# Altium PCB BuckBoost-1.PcbDoc (part 2 of 2)
Units mil, origin at the board's own origin, x right, y up, seen from the top; angles counter-clockwise.
Board outline 4724.41 x 2755.91 mil, 2 copper layers (Top Layer, Bottom Layer); 132 components, 89 nets, 410 pads, 962 vias.
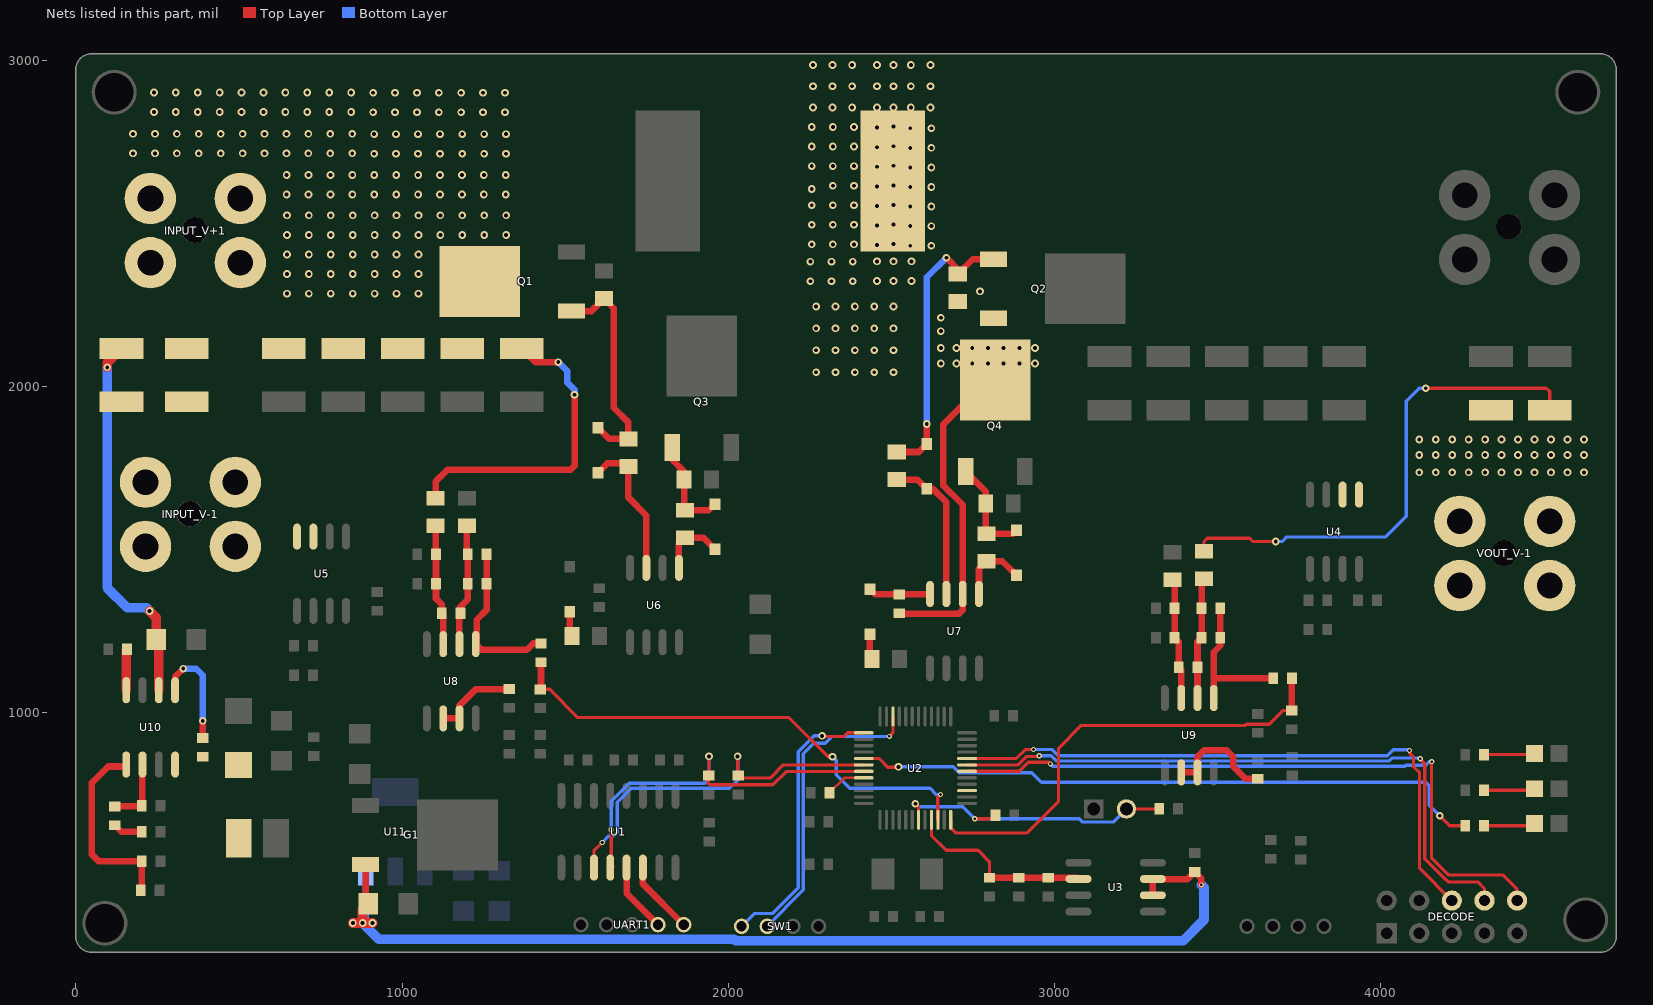
[diagram p2: the nets of this part, all layers, seen from the top]

## Via types
v1: diameter 23.62, hole 11.81, Top Layer to Bottom Layer, tented both sides, 942 vias
v2: diameter 16, hole 8, Top Layer to Bottom Layer, tented both sides, 16 vias
v3: diameter 16, hole 10, Top Layer to Bottom Layer, tented both sides, 2 vias
v4: diameter 16, hole 11.81, Top Layer to Bottom Layer, tented both sides, 1 vias
v5: diameter 16, hole 8, Top Layer to Bottom Layer, 1 vias

## Nets (pads, with @x,y where several pads share a name; then routed paths per layer and width w, separated by ;. In a path a pad name is that pad's centre, name@x,y a point inside that pad or via, vN(x,y) a via of type N, cw(c..) or ccw(c..) an arc to the next point about the centre after c; other vN are vias at no path point) (continued)
NetC36_1: C36.1 L1.2 Q2.S Q4.D R14.2 U7.6 | length 1009.3
  Top Layer w20: C36.1@2524.6,1305 2525.66,1303.94 2707.94,1303.94 2719,1315 U7.6@2719,1363.94 2719,1637.43 2659,1697.43 2659,1883 Q4.D@2796.75,2020.75 ; Q4.D@2814.19,2020.75 Q4.D@2836.44,2020.75
  other v1: 2269.56,2044 2328.92,2044 2388.28,2044 2447.64,2044 2507,2044 2652,2071 2700.17,2071 2748.33,2071 2796.5,2071 2844.67,2071 2892.83,2071 2941,2071 2269.56,2111.2 2328.92,2111.2 2388.28,2111.2 2447.64,2111.2 2507,2111.2 2652,2118 2700.17,2118 2748.33,2118 2796.5,2118 2844.67,2118 2892.83,2118 2941,2118 2652,2170 2269.56,2178.4 2328.92,2178.4 2388.28,2178.4 2447.64,2178.4 2507,2178.4 2652,2211 2269.56,2245.6 2328.92,2245.6 2388.28,2245.6 2447.64,2245.6 2507,2245.6 2772,2292 2252,2323 2317,2323 2382,2323 2456,2324 2507,2324 2562,2324 2252,2383 2317,2383 2382,2383 2456,2384 2507,2384 2562,2384 2558,2432 2623,2432 2456,2434 2256,2436 2321,2436 2386,2436 2507,2437 2558,2492 2623,2492 2456,2494 2256,2496 2321,2496 2386,2496 2507,2497 2558,2552 2623,2552 2456,2554 2256,2556 2321,2556 2386,2556 2507,2557 2256,2606 2558,2612 2623,2612 2456,2614 2321,2616 2386,2616 2507,2617 2558,2672 2623,2672 2456,2674 2256,2676 2321,2676 2386,2676 2507,2677 2558,2732 2623,2732 2456,2734 2256,2736 2321,2736 2386,2736 2507,2737 2558,2792 2623,2792 2456,2794 2256,2796 2321,2796 2386,2796 2507,2797 2260,2856 2320,2856 2380,2856 2456,2856 2507,2856 2560,2856 2620,2856 2260,2921 2320,2921 2380,2921 2456,2921 2507,2921 2560,2921 2620,2921 2260,2986 2320,2986 2380,2986 2456,2986 2507,2986 2560,2986 2620,2986
NetC36_2: C36.2 D2.2 U7.8 | length 192.1
  Top Layer w20: D2.2@2434.22,1378.9 2450.56,1362.56 C36.2@2524.6,1362.56 2617.62,1362.56 U7.8@2619,1363.94
NetC38_1: C38.1 C40.2 R19.1 R21.2 U8.3 | length 372.2
  Top Layer w20: R21.2@1102.73,1572.97 1102.73,1486.67 C38.1@1104,1485.39 R19.1@1104,1395.38 1104,1350 1121.44,1332.56 C40.2@1121.44,1305.37 1126,1300.81 U8.3@1126,1210.36
NetC39_1: C39.1 C41.2 R20.1 R22.2 U9.3 | length 373.5
  Top Layer w20: R22.2@3362.73,1407.58 3368.93,1401.37 R20.1@3368.93,1320 C39.1@3368.93,1229.99 3381.44,1217.48 C41.2@3381.44,1139.98 3389,1132.42 U9.3@3389,1044.97
NetC40_1: C40.1 C44.2 R25.2 R27.2 U8.2 | length 374.2
  Top Layer w20: U8.2@1176,1210.36 1176,1302.37 C40.1@1179,1305.37 1179,1325 1201.44,1347.44 R27.2@1201.44,1395.38 C44.2@1201.44,1485.39 1199,1487.83 R25.2@1199,1572.97
NetC41_1: C41.1 C45.2 R26.2 R28.2 U9.2 | length 373.9
  Top Layer w20: U9.2@3439,1044.97 C41.1@3439,1139.98 3439,1217.55 C45.2@3451.44,1229.99 R28.2@3451.44,1320 3451.44,1403.07 R26.2@3459,1410.63
NetC44_1: C44.1 R23.2 R27.1 U8.1 | length 504.4
  Top Layer w20: C44.1@1259,1485.39 R27.1@1259,1395.38 1259,1315 1229,1285 1229,1213.36 U8.1@1226,1210.36 1243.36,1193 1383,1193 1403,1213 1425.56,1213 R23.2@1426,1212.56
NetC45_1: C45.1 R24.2 R28.1 U9.1 | length 465.8
  Top Layer w20: U9.1@3489,1044.97 3489,1105 ; R28.1@3509,1320 C45.1@3509,1229.99 3509,1205 3489,1185 3489,1105 ; R24.2@3671.44,1105 3489,1105
NetC49_1: C49.1 D7.2 R31.1 U10.8 | length 2
  Top Layer w20: D7.2@497.58,841.06 D7.2@499,839.65
NetC49_2: C49.2 U10.1 | length 340.6
  Top Layer w20: U10.1@304,1068.94 304,1110 v1(329,1135) ; C49.2@386.56,925 C49.2@389,922.56 v1(389,975)
  Bottom Layer w20: v1(329,1135) 369,1135 389,1115 v1(389,975)
NetC53_2: C53.2 R33.2 U10.6 | length 210.6
  Top Layer w20: R33.2@119,712.56 199,712.56 C53.2@201.44,715 204,717.56 U10.6@204,841.06
NetC54_2: C54.2 R33.1 | length 90.7
  Top Layer w20: R33.1@119,655 139,635 C54.2@201.44,635
NetC55_2: C55.2 U10.4 | length 127.1
  Top Layer w30: U10.4@154,1068.94 154,1192.44 C55.2@156.56,1195
NetD1_1: D1.1 R11.2 | length 76.9
  Top Layer w20: D1.1@1514.1,1309.05 1514.1,1241.76 R11.2@1520.86,1235
NetD2_1: D2.1 R12.2 | length 78.9
  Top Layer w20: D2.1@2434.22,1241.1 2434.22,1171.64 R12.2@2440.86,1165
NetD3_1: D3.1 Q2.G R14.1 R16.2 | length 890.5
  Top Layer w20: R16.2@2517.19,1799.37 2584.37,1799.37 D3.1@2608.9,1823.9 2608.9,1884.9 v1(2609,1885) ; v1(2669,2395) 2704,2360 R14.1@2704,2345 2749.55,2390.55 Q2.G@2813.25,2390.55
  Bottom Layer w20: v1(2609,1885) 2609,2335 v1(2669,2395)
NetD3_2: D3.2 R16.1 U7.7 | length 461.9
  Top Layer w20: R16.1@2517.19,1715 2580,1715 D3.2@2608.9,1686.1 2627.9,1686.1 2669,1645 U7.7@2669,1363.94
NetD4_1: D4.1 Q1.G R13.1 R15.2 | length 684.5
  Top Layer w20: Q1.G@1519.75,2231.68 1580.72,2231.68 R13.1@1619.03,2270 1649,2240.03 1649,1935 1694,1890 R15.2@1694,1839.37 1635.21,1839.37 D4.1@1600.68,1873.9
NetD4_2: D4.2 R15.1 U6.7 | length 443.3
  Top Layer w20: D4.2@1600.68,1736.1 1629.58,1765 1684,1765 R15.1@1694,1755 1694,1660 1749,1605 U6.7@1749,1443.94
NetD5_1: D5.1 Q4.G R10.2 R17.2 | length 312.4
  Top Layer w20: Q4.G@2728.45,1739.25 2789.63,1678.07 R10.2@2789.63,1641.58 2789.63,1551.63 R17.2@2792.19,1549.06 2874.06,1549.06 D5.1@2883.9,1558.9
NetD5_2: D5.2 R17.1 U7.5 | length 220.1
  Top Layer w20: U7.5@2769,1363.94 2769,1441.5 R17.1@2792.19,1464.69 2840.31,1464.69 D5.2@2883.9,1421.1
NetD6_1: D6.1 Q3.G R9.2 R18.2 | length 307.5
  Top Layer w20: Q3.G@1828.45,1812.68 1828.45,1775.55 1864.63,1739.37 R9.2@1864.63,1715 1864.63,1623.25 R18.2@1867.19,1620.68 1940.25,1620.68 D6.1@1958.9,1639.34
NetD6_2: D6.2 R18.1 U6.5 | length 206
  Top Layer w20: U6.5@1849,1443.94 1849,1518.12 R18.1@1867.19,1536.31 1924.13,1536.31 D6.2@1958.9,1501.54
NetDECODE_6: DECODE.6 U2.20 | length 1897.9
  Top Layer w10: U2.20@2732.46,859.53 2882.78,859.53 2910.25,887 v2(2936,887) ; v2(4089,884) 4089,877 4101,865 4101,835 4120,816 4120,523 DECODE.6@4219,424
  Bottom Layer w10: v2(2936,887) 2993.63,887 3012.63,868 4021,868 4039,886 4087,886 v2(4089,884)
NetDECODE_8: DECODE.8 U2.19 | length 1982.4
  Top Layer w10: U2.19@2732.46,839.84 2888.84,839.84 2915,866 2952,866 v2(2954,868) ; v2(4122,859) 4122,857 4136,843 4136,552.11 4200.92,487.19 4201.81,487.19 4208,481 4298,481 4319,460 DECODE.8@4319,424
  Bottom Layer w10: v2(2954,868) 2990,868 3006,852 4027.63,852 4036.81,861.19 4119.81,861.19 v2(4122,859)
NetDECODE_10: DECODE.10 U2.18 | length 2080
  Top Layer w10: U2.18@2732.46,820.16 2892.16,820.16 2920,848 2983,848 v2(2988,843) ; v2(4157,850) 4156.19,849.19 4156.19,554.55 4207.55,503.19 4209.81,503.19 4211,502 4376,502 4419,459 DECODE.10@4419,424
  Bottom Layer w10: v2(2988,843) 2995,836 4075,836 4078,839 4139,839 4150,850 v2(4157,850)
NetERR1_2: ERR1.2 R7.2 | length 157.1
  Top Layer w10: R7.2@4317.56,762.09 4467.69,762.09 ERR1.2@4472.6,767
NetHeat1_2: Heat1.2 R8.2 | length 156.4
  Top Layer w10: R8.2@4317.56,871.59 4469.2,871.59 Heat1.2@4472.6,874.99
NetR5_2: R5.2@2310.96,755.01 U2.44 | length 123.4
  Top Layer w8: R5.2@2310.96,755.01 2356.42,800.47 U2.44@2415.54,800.47
NetR6_2: R6.2 RUN1.2 | length 157.7
  Top Layer w10: R6.2@4317.56,653.59 4466.19,653.59 RUN1.2@4472.6,660
NetR29_2: R29.2 U9.6 U9.7 | length 343.6
  Top Layer w20: U9.6@3389,817.1 3434.12,817.1 U9.7@3436.56,814.65 ; U9.7@3439,817.1 3439,865 3459,885 3529,885 3549,865 3549,835 3586.56,797.44 R29.2@3624,797.44
NetR30_2: R30.2 U8.6 U8.7 | length 264.2
  Top Layer w20: U8.6@1126,982.49 U8.7@1176,982.49 1176,1022 1226.56,1072.56 R30.2@1329,1072.56 R30.2@1328.44,1072
NetR32_1: R32.1 R34.2 U10.5 | length 600
  Top Layer w20: U10.5@154,841.06 147.94,835 99,835 49,785 49,565 69,545 R34.2@201.44,545 201.44,457.44 R32.1@199,455
NetU1_13: U1.13 UART1.2 | length 215
  Top Layer w20: U1.13@1688.4,525.15 1688.4,446.26 UART1.2@1784.66,350
NetU1_14: U1.14 UART1.1 | length 226.9
  Top Layer w20: U1.14@1738.4,525.15 1738.4,475 UART1.1@1863.4,350
NRST: C13.2 J1.2 R5.2@3321.44,705 U2.7 | length 908.8
  Top Layer w10: v1(2574,721) 2583.84,711.16 U2.7@2583.84,671.54 ; v2(2756,675) 2809.44,675 C13.2@2819.44,685 ; J1.2@3221,705.01 R5.2@3321.44,705
  Bottom Layer w10: v1(2574,721) 2583.5,711.5 2719.5,711.5 v2(2756,675) 3076.4,675 3086.92,664.48 3180.47,664.48 J1.2@3221,705.01
OPAMP2_VINM: U2.15
REF_3: C5.2 C6.2 C14.2 U2.9 U3.6 | length 583.3
  Top Layer w10: U2.9@2623.21,671.54 2623.21,623.43 2668.64,578 2766.1,578 2801.1,543 C6.2@2801.1,493.56
  Top Layer w20: C6.2@2801.1,493.56 C5.2@2891.11,493.56 C14.2@2981.12,493.56 3070.57,493.56 U3.6@3074.13,490
RUN_GREEN: R6.1 U2.41 | length 1965.7
  Top Layer w10: U2.41@2415.54,859.53 2462.47,859.53 2489,833 2521,833 v1(2522,834) ; v1(4182,684) 4212.41,653.59 R6.1@4260,653.59
  Bottom Layer w10: v1(2522,834) 2690.33,834 2708.33,816 2931.33,816 2960.33,787 4139,787 4150,776 4150,716 v1(4182,684)
SWCLK: SW1.4 U2.37 | length 866.3
  Top Layer w10: v1(2288,929) 2289.81,927.19 2355.19,927.19 2366.27,938.27 U2.37@2415.54,938.27
  Bottom Layer w10: SW1.4@2040.89,345 2079.89,384 2135.37,384 2214.41,463.03 2214.41,880.22 2263.18,929 v1(2288,929)
SWDIO: SW1.3 U2.34 | length 926.3
  Top Layer w10: v2(2494.37,927.37) 2505.1,938.1 U2.34@2505.1,988.46
  Bottom Layer w10: SW1.3@2119.63,345 2119.63,345.63 2230.41,456.41 2230.41,873.59 2263,906.19 2297.45,906.19 2318.63,927.37 v2(2494.37,927.37)
UART1_RX: R1.1 U1.12 U2.43 | length 1164.3
  Top Layer w10: U1.12@1641,527.75 v3(1641,641) ; v1(1941,866) 1941,807.67 R1.1@1940.33,807 1939,805.67 1939,784 1944,779 2137,779 2177.39,819.39 U2.43@2399,819.39
  Top Layer w20: U1.12@1638.4,525.15 U1.12@1641,527.75
  Bottom Layer w10: v3(1641,641) 1641,729 1696,784 1929,784 1941,796 v1(1941,866)
UART1_TX: R2.1 U1.11 U2.42 | length 1173.2
  Top Layer w8: R2.1@2030.34,807 R2.1@2037.89,799.45
  Top Layer w10: U1.11@1588.4,525.15 1588.4,576.4 v3(1614,602) ; v1(2029,866) 2029,808.34 R2.1@2030.34,807 ; R2.1@2037.89,799.45 2128.53,799.45 2168.92,839.84 U2.42@2415.54,839.84
  Bottom Layer w10: v3(1614,602) 1634,622 1648.87,622 1660,633.13 1660,725.37 1702.63,768 2004,768 2029,793 v1(2029,866)
VCC: C12.2 C57.2 G1.3 U3.2 U3.3 U11.3 | length 3380.6
  Top Layer w20: C57.2@879,396.99 888.25,406.24 G1.3@888.25,534.45 ; U3.2@3302,440 U3.3@3302,490 3408.08,490 C12.2@3430,511.92 3451,490.92 v5(3451,472)
  Top Layer w30: v1(849,355) v1(879,355) ; C57.2@879,396.99 v1(879,355) ; v1(909,355) v1(879,355)
  Bottom Layer w20: v1(879,355) 888.45,364.45 U11.3@888.45,512.95
  Bottom Layer w30: v1(879,355) 929,305 2017.78,305 2022.41,300.38 3394.38,300.38 3459,365 3459,464 v5(3451,472)
VCC_50V: C15.2 C16.2 C17.2 C18.2 C19.2 C20.2 C21.2 C50.2 INPUT_V+1.1 INPUT_V+1.2 INPUT_V+1.3 INPUT_V+1.4 INPUT_V+1.5 Q1.D R21.1 U10.2 | length 2131.7
  Top Layer w20: R21.1@1102.73,1657.34 1102.73,1708.73 1139,1745 1516.57,1745 1529,1757.43 v1(1529,1975) ; C21.2@1367.3,2117.18 1409.49,2075 v1(1479,2075)
  Top Layer w30: v1(96,2059) 96,2073.4 C15.2@139.78,2117.18 ; v1(226,1312) 246.01,1291.99 C50.2@246.01,1224 254,1216.01 U10.2@254,1068.94
  Bottom Layer w20: v1(1479,2075) 1507.19,2046.81 1507.19,2011.82 1529,1990.01 v1(1529,1975)
  Bottom Layer w30: v1(96,2059) 96,1383 157,1322 216,1322 v1(226,1312)
  other v1: 647,2285 714.2,2285 781.4,2285 848.6,2285 915.8,2285 983,2285 1050.2,2285 647,2345 714.2,2345 781.4,2345 848.6,2345 915.8,2345 983,2345 1050.2,2345 647,2405 714.2,2405 781.4,2405 848.6,2405 915.8,2405 983,2405 1050.2,2405 647,2465 714.2,2465 781.4,2465 848.6,2465 915.8,2465 983,2465 1050.2,2465 1117.4,2465 1184.6,2465 1251.8,2465 1319,2465 647,2525 714.2,2525 781.4,2525 848.6,2525 915.8,2525 983,2525 1050.2,2525 1117.4,2525 1184.6,2525 1251.8,2525 1319,2525 646,2589 713.2,2589 780.4,2589 847.6,2589 914.8,2589 982,2589 1049.2,2589 1116.4,2589 1183.6,2589 1250.8,2589 1318,2589 646,2649 713.2,2649 780.4,2649 847.6,2649 914.8,2649 982,2649 1049.2,2649 1116.4,2649 1183.6,2649 1250.8,2649 1318,2649 914.4,2714 981.6,2714 1048.8,2714 1116,2714 1184.4,2714 1251.6,2714 1318.8,2714 175,2715 242.2,2715 309.4,2715 376.6,2715 443.8,2715 511,2715 578.2,2715 645.4,2715 712.6,2715 779.8,2715 847,2715 914.4,2774 981.6,2774 1048.8,2774 1116,2774 1184.4,2774 1251.6,2774 1318.8,2774 175,2775 242.2,2775 309.4,2775 376.6,2775 443.8,2775 511,2775 578.2,2775 645.4,2775 712.6,2775 779.8,2775 847,2775 911.2,2841 978.4,2841 1045.6,2841 1112.8,2841 1181.2,2841 1248.4,2841 1315.6,2841 239,2842 306.2,2842 373.4,2842 440.6,2842 507.8,2842 575,2842 642.2,2842 709.4,2842 776.6,2842 843.8,2842 911.2,2901 978.4,2901 1045.6,2901 1112.8,2901 1181.2,2901 1248.4,2901 1315.6,2901 239,2902 306.2,2902 373.4,2902 440.6,2902 507.8,2902 575,2902 642.2,2902 709.4,2902 776.6,2902 843.8,2902
VIN: C42.1 R23.1 U2.10 | length 1551.5
  Top Layer w10: C42.1@1424,1071.53 1452.47,1071.53 1539,985 2186.38,985 2306.38,865 v1(2320,865) ; U2.10@2642.9,671.54 2642.9,740.9 v2(2651,749)
  Top Layer w20: C42.1@1424,1071.53 1426,1073.53 R23.1@1426,1155
  Bottom Layer w10: v1(2320,865) 2331,854 2331,810 2373,768 2619.13,768 2638.13,749 v2(2651,749)
VIN_N: C15.1 C16.1 INPUT_V-1.1 INPUT_V-1.2 INPUT_V-1.3 INPUT_V-1.4 INPUT_V-1.5 U5.3 U5.4
VOUT: C22.2 C23.2 C24.2 C25.2 C26.2 C27.2 C28.2 Q2.D R22.1 VOUT_V+1.1 VOUT_V+1.2 VOUT_V+1.3 VOUT_V+1.4 VOUT_V+1.5 | length 1690.8
  Top Layer w10: R22.1@3362.73,1491.95 3362.73,1528.73 3385,1551 3635,1551 v1(3639,1555) ; v1(4089,2005) 4109,2025 4159,2025 4169,2015 4509,2015 4519,2025 C28.2@4519,2092.18
  Bottom Layer w10: v1(3639,1555) 4009,1555 4059,1605 4059,1975 v1(4089,2005)
  other v1: 4135,2049.46 4059.67,2049.55 4197,2049.56 4059.67,2108.28 4135,2108.23 4197,2108.28 4059.67,2167 4135,2167 4197,2167 3237.56,2207 3296.28,2207 3355,2207 3413.72,2207 3472.44,2207 3531.17,2207 3589.89,2207 3648.61,2207 3707.33,2207 3766.06,2207 3824.78,2207 3883.5,2207 3942.22,2207 4000.94,2207 4059.67,2207 4110.83,2207 4169.56,2207 4226.39,2207 4285.11,2207 4343.83,2207 4402.56,2207 4461.28,2207 4520,2207 4113.17,2255.4 4171.89,2255.4 4228.72,2255.4 4287.44,2255.4 4346.17,2255.4 4404.89,2255.4 4463.61,2255.4 4522.33,2255.4 3239.89,2274.4 3298.61,2274.4 3357.33,2274.4 3416.06,2274.4 3474.78,2274.4 3533.5,2274.4 3592.22,2274.4 3650.94,2274.4 3709.67,2274.4 3768.39,2274.4 3827.11,2274.4 3885.83,2274.4 3944.56,2274.4 4003.28,2274.4 4059.67,2274.4 3239.89,2336.4 3298,2336.4 3356.77,2336.4 3415.54,2336.4 3474.31,2336.4 3533.08,2336.4 3591.85,2336.4 3650.62,2336.4 3709.38,2336.4 3768.15,2336.4 3826.92,2336.4 3885.69,2336.4 3944.46,2336.4 4003.23,2336.4 4062,2336.4 3239.89,2406.4 3298.61,2406.4 3357.33,2406.4 3416.06,2406.4 3474.78,2406.4 3533.5,2406.4 3592.22,2406.4 3650.94,2406.4 3709.67,2406.4 3768.39,2406.4 3827.11,2406.4 3885.83,2406.4 3944.55,2406.4 4003.28,2406.4 4062,2406.4 2767.83,2473 2826.56,2473 2885.28,2473 2944,2473 3005,2476 3063.72,2476 3122.44,2476 3181.17,2476 3239.89,2476 3298.61,2476 3357.33,2476 3416.06,2476 3474.78,2476 3533.5,2476 3592.22,2476 3650.94,2476 3709.67,2476 3768.39,2476 3827.11,2476 3885.83,2476 3944.56,2476 4003.28,2476 4062,2476 2767.83,2545.13 2826.56,2545.13 2885.28,2545.13 2944,2545.13 3005,2547.13 3063.72,2547.13 3122.44,2547.13 3181.17,2547.13 3239.89,2547.13 3298.61,2547.13 3357.33,2547.13 3416.06,2547.13 3474.78,2547.13 3533.5,2547.13 3592.22,2547.13 3650.94,2547.13 3709.67,2547.13 3768.39,2547.13 3827.11,2547.13 3885.83,2547.13 3944.56,2547.13 4003.28,2547.13 4062,2547.13 2767.83,2617.27 2826.56,2617.27 2885.28,2617.27 2944,2617.27 3005,2618.27 3063.72,2618.27 3122.44,2618.27 3181.17,2618.27 3239.89,2618.27 3298.61,2618.27 3357.33,2618.27 3416.06,2618.27 3474.78,2618.27 3533.5,2618.27 3592.22,2618.27 3650.94,2618.27 3709.67,2618.27 3768.39,2618.27 3827.11,2618.27 3885.83,2618.27 3944.56,2618.27 4003.28,2618.27 4062,2618.27 2767.83,2689.4 2826.56,2689.4 2885.28,2689.4 2944,2689.4 3005,2689.4 3063.72,2689.4 3122.44,2689.4 3181.17,2689.4 3239.89,2689.4 3298.61,2689.4 3357.33,2689.4 3416.06,2689.4 3474.78,2689.4 3533.5,2689.4 3592.22,2689.4 3650.94,2689.4 3709.67,2689.4 3768.39,2689.4 3827.11,2689.4 3885.83,2689.4 3944.56,2689.4 4003.28,2689.4 4062,2689.4 3005,2760.53 3063.72,2760.53 3122.44,2760.53 3181.17,2760.53 3239.89,2760.53 3298.61,2760.53 3357.33,2760.53 3416.06,2760.53 3474.78,2760.53 3533.5,2760.53 3592.22,2760.53 3650.94,2760.53 3709.67,2760.53 3768.39,2760.53 3827.11,2760.53 3885.83,2760.53 3944.56,2760.53 4003.28,2760.53 4062,2760.53 2767.83,2761.53 2826.56,2761.53 2885.28,2761.53 2944,2761.53 3005,2831.67 3063.72,2831.67 3122.44,2831.67 3181.17,2831.67 3239.89,2831.67 3298.61,2831.67 3357.33,2831.67 3416.06,2831.67 3474.78,2831.67 3533.5,2831.67 3592.22,2831.67 3650.94,2831.67 3709.67,2831.67 3768.39,2831.67 3827.11,2831.67 3885.83,2831.67 3944.56,2831.67 4003.28,2831.67 4062,2831.67 2767.83,2833.67 2826.56,2833.67 2885.28,2833.67 2944,2833.67 3005,2902.8 3063.72,2902.8 3122.44,2902.8 3181.17,2902.8 3239.89,2902.8 3298.61,2902.8 3357.33,2902.8 3416.06,2902.8 3474.78,2902.8 3533.5,2902.8 3592.22,2902.8 3650.94,2902.8 3709.67,2902.8 3768.39,2902.8 3827.11,2902.8 3885.83,2902.8 3944.56,2902.8 4003.28,2902.8 4062,2902.8 2767.83,2905.8 2826.56,2905.8 2885.28,2905.8 2944,2905.8 3006.5,2973.93 3065.22,2973.93 3123.94,2973.93 3182.67,2973.93 3241.39,2973.93 3300.11,2973.93 3358.83,2973.93 3417.56,2973.93 3476.28,2973.93 3535,2973.93 3593.72,2973.93 3652.44,2973.93 3711.17,2973.93 3769.89,2973.93 3828.61,2973.93 3887.33,2973.93 3946.06,2973.93 4004.78,2973.93 4063.5,2973.93 2769.33,2977.93 2828.06,2977.93 2886.78,2977.93 2945.5,2977.93
VOUT: C43.1 R24.1 U2.12 | length 1409.2
  Top Layer w10: U2.12@2682.27,671.54 2682.27,647.73 2699,631 2915,631 3013,729 3013,891.63 3082.37,961 3585.53,961 3589,964.47 3658.47,964.47 3700.53,1006.53 C43.1@3728.4,1006.53
  Top Layer w20: C43.1@3728.4,1006.53 R24.1@3728.4,1088
VOUT_P: C27.1 C28.1 R26.1 U4.1 U4.2 VOUT_V-1.1 VOUT_V-1.2 VOUT_V-1.3 VOUT_V-1.4 VOUT_V-1.5 | length 1564.8
  Top Layer w10: R26.1@3459,1495 3459,1525 3469,1535 3599,1535 3609,1525 v1(3679,1525) ; v1(4139,1995) 4509,1995 4519,1985 4519,1930.63 4516.19,1927.82 C28.1@4519,1927.82
  Bottom Layer w10: v1(3679,1525) 3699,1525 3713,1539 4015.63,1539 4079,1602.37 4079,1955 4119,1995 v1(4139,1995)
  other v1: 4119,1737 4169.5,1737 4220,1737 4270.5,1737 4321,1737 4371.5,1737 4422,1737 4472.5,1737 4523,1737 4573.5,1737 4624,1737 4119,1790 4169.5,1790 4220,1790 4270.5,1790 4321,1790 4371.5,1790 4422,1790 4472.5,1790 4523,1790 4573.5,1790 4624,1790 4119,1838 4169.5,1838 4220,1838 4270.5,1838 4321,1838 4371.5,1838 4422,1838 4472.5,1838 4523,1838 4573.5,1838 4624,1838
pads on no net: C52.1 C52.2 U1.7 U1.8 U1.9 U2.16 U2.17 U2.38 U3.1 U3.5 U3.7 U3.8 U10.3 U11.4 UART1.4 UART1.5

## Polygon pours and split planes (outlines as drawn)
NetC36_1 on Top Layer "VCC_in" (solid, remove dead copper, pour order 49): 831,450 831,343 829,341 836,334 855,334 923,334 927,338 939,350 939,445 939,449 931,457 927,461 839,461 839,459 832,452
VCC_50V on Top Layer "VCC_in" (solid, remove dead copper, pour order 0): 22.91,3020.91 -1,2997 -1,2085 1438.17,2085 1438.17,2999.83 1417.09,3020.91
VIN_N on Top Layer "VCC_in" (solid, remove dead copper, pour order 2): -1,1970 -1,1413 12,1400 669,1400 734,1465 739,1475 739,1745 699,1785 619,1785 559,1785 469,1875 449,1895 449,1975 429,1995 24,1995
AGND on Top Layer "VCC_in" (solid, remove dead copper, pour order 4): 769,1461 785,1445 969,1445 969,1785 984.82,1805 1503,1805 1503,1981 1489,1995 499,1995 479,1975 479,1898 567,1810 717,1810 727,1810 769,1768
NetC35_1 on Top Layer "VCC_in" (solid, remove dead copper, pour order 6): 1479,2515 1479,2379 1525,2333 1673,2333 1696,2310 1696,1972 2059,1972 2059,2905 2059,3002 1479,3002 1479,2880
NetC36_1 on Top Layer "VCC_in" (solid, remove dead copper, pour order 7): 2203,3020.91 2203,1971 2959,1971 2959,2125 2919,2165 2869,2215 2809,2275 2669,2275 2669,3020.91
VOUT on Top Layer "VCC_in" (hatched 90Degree grid 8 track 8, remove dead copper, pour order 9): 2731,2403 3029,2105 3079,2055 3979,2055 4059,2055 4139,2055 4169,2055 4710,2055 4723.41,2068.41 4723.41,3020.91 2731,3020.91
VOUT_P on Top Layer "VCC_in" (solid, remove dead copper, pour order 13): 4185,1968 4711,1968 4723.41,1955.59 4723.41,1287 4060,1287 4060,1564 4039,1585 3909,1585 3879,1585 3869,1595 3869,1785 3899,1815 3919,1835 4052,1835
AGND on Top Layer "VCC_in" (solid, remove dead copper, pour order 15): 2829,1845 2829,1615 2829,1605 2849,1585 2949,1585 3169,1585 3779,1585 3839,1585 3849,1595 3849,1775 3849,1795 3909,1855 4029,1855 4039,1865 4039,1895 4039,1905 4039,1915 4039,1925 4039,1945 4029,1955 3089,1955 3059,1955 3009,1905 2959,1855 2849,1855
AGND on Top Layer "VCC_in" (hatched 90Degree grid 8 track 8, remove dead copper, pour order 19): 1939,1905 1939,1705 1949,1695 2219,1695 2239,1715 2239,1895 2209,1925 1959,1925
NetC49_1 on Top Layer "VCC_in" (solid, remove dead copper, pour order 21): 289,885 289,775 339,725 339,545 349,535 529,535 539,545 539,885
+12V on Top Layer "VCC_in" (hatched 90Degree grid 8 track 8, remove dead copper, pour order 23): 569,545 579,535 699,535 709,545 709,765 729,785 779,785 789,775 799,765 799,695 929,695 929,785 929,885 769,885 579,885 569,875
VOUT on Top Layer "VCC_in" (hatched 90Degree grid 8 track 8, remove dead copper, pour order 25): 839,565 839,325 949,325 949,565
GND on Top Layer "VCC_in" (solid, remove dead copper, pour order 29): -1,1262.5 -1,939 47,891 96,891 180,891 225,891 229,887 229,805 277,805 277,891 277,924 309,956 461,956 665,956 688,979 688,1120 676,1132 438,1132 320,1014 144,1014 116,1042 116,1243 116,1262.5
GND on Top Layer "VCC_in" (solid, remove dead copper, pour order 43): 8,271 222.02,271 267.02,271 4424.02,271 4658.02,271 4716,328.98 4716,1272.02 2423.02,1264 56.02,1264 8,1215.98
AGND on Top Layer "VCC_in" (solid, remove dead copper, pour order 45): 1586.34,1886 1588.75,1291 4031,1291 4031,1886
AGND on Top Layer "VCC_in" (solid, remove dead copper, pour order 59): 967,1810 967,1285 1783,1285 1789,1291 1882,1291 1882,1567 1882,1810
GND on Bottom Layer "VCC_in" (solid, remove dead copper, pour order 57): 743,1264.33 718,1285.73 718,1349.89 695.37,1370 659,1370 18,1370 9,1361 7.67,1359.67 7.67,1268 7.67,1264.33 15,1257 19,1261 737,1261
VIN_N on Bottom Layer "VCC_in" (solid, remove dead copper, pour order 53): 25,1995 20,1995 3,1978 11,1970 11,1400 667,1400 739,1472 739,1749 701,1787 701,1790 557,1790 556,1789 449,1895 449,1974 425.99,1997.01
VOUT_P on Bottom Layer "VCC_in" (solid, remove dead copper, pour order 51): 4722,1970 4714.74,1962.74 4714.74,1287 4094,1287 4094,1918 4148,1972 4710,1972
NetC36_1 on Bottom Layer "VCC_in" (solid, remove dead copper, pour order 47): 2199,3010 2198,3009 2198,2037 2198,2026 2965,2026 2965,2124 2965,2126 2723,2368 2698,2393 2698,2525 2698,2997 2685,3010
VCC_50V on Bottom Layer "VCC_in" (solid, remove dead copper, pour order 17): 8,3005 8,2085 1439,2085 1439,2285 1439,3011 14,3011
AGND on Bottom Layer "VCC_in" (solid, remove dead copper, pour order 33): 747,1995 498,1995 479,1976 479,1895 563,1811 725,1811 760.62,1775.38 762.56,1288 4030,1288 4030,1995
VOUT on Bottom Layer "VCC_in" (solid, remove dead copper, pour order 35): 2729.21,2980.21 2729.8,2401.2 3080,2051 3081,2052 4713,2052 4721.97,2060.97 4721.21,2993.79 4703.5,3011.5 2760.5,3011.5
NetC35_1 on Bottom Layer "VCC_in" (solid, remove dead copper, pour order 37): 1475,3001.28 1475,2383 1507,2351 1508,2350 1641,2350 1641,2030 2062,2030 2062,2040 2062,2904 2062,3003 2054,3011 1482.62,3011
GND on Bottom Layer "VCC_in" (solid, remove dead copper, pour order 41): -1,265.74 222,265.74 267,265.74 4424,265.74 4716.74,265.74 4723.41,272.41 4723.41,1268 -1,1268

## Keep-outs
Keep-Out Layer:
  lines w5: -1,315 ccw(c49,315) 49,265 117.11,265 4605.3,265 4673.41,265 ccw(c4673.41,315) 4723.41,315 4723.41,383.11 4723.41,2902.8 4723.41,2970.91 ccw(c4673.41,2970.91) 4673.41,3020.91 4605.3,3020.91 117.11,3020.91 49,3020.91 ccw(c49,2970.91) -1,2970.91 -1,2902.8 -1,383.11 -1,315

## Other copper
Top Layer:
  pour cut-out: 4005,1576 4005,1574.05 4031,1548.05 4038,1555.05 4038,1575
  pour cut-out: 2631.98,1404.91 2633.51,1403.38 2633.51,1322.92 2636.18,1320.25 2651.82,1320.25 2651.82,1322.58 2656,1326.76 2656,1401.6 2652.69,1404.91
  pour cut-out: 1596,575 1601,570 1601,489 1620.6,489 1625.42,484.17 1625.42,566.13 1626.87,566.13 1629.78,569.04 1629.78,591.42 1619.29,591.42 1615.98,588.12
  pour cut-out: 1752,556 1752,478 1751,477 1767,461 1777,461 1777,556 1776,557
  pour cut-out: 903,824 930,824 938,816 939.2,817.2 939.2,845.8 934,851 932,849 926,849
  pour cut-out: 828.72,888.12 875.84,841 884.16,841 913.15,869.99 934.17,869.99 938.38,874.2 938.38,889.2 829.17,889.2
  pour cut-out: 1762,1514 1757,1509 1757,1407 1757.94,1407 1761.98,1402.96 1782.69,1402.96 1782.69,1408.27 1782.04,1408.91 1788,1414.87 1788,1511
  pour cut-out: 2836.69,1014.5 2823,1000.81 2823,939.14 2818.66,934.8 2820.73,932.73 2820.73,929.8 2847.94,929.8 2857,938.86 2857,1012 2854.5,1014.5
  pour cut-out: 2515.63,558.24 2515.63,522.58 2517.54,520.67 2526.67,520.67 2539,533 2534.28,537.72 2534.28,558.24
  pour cut-out: 2512,558.24 2512,474 2525,487 2575,487 2585,477 2585,558.24
  pour cut-out: 2489.77,440.2 2460.77,406.77 2460.77,353.84 2489.77,353.84 2491.77,355.84 2489.77,357.84 2489.77,425.77
  pour cut-out: 2605,401 2605,353 2606.5,351.5 2625.56,351.5 2630.74,428 2600,453
  pour cut-out: 2777.6,479.03 2777.6,451.4 2779,450 3001,450 3001,473.41 3001,477
  pour cut-out: 3299,555 3261.02,555 3261.02,519.02 3261.02,502 3397,502 3401.96,506.96 3421.01,526 3446.58,526 3456,535.42 3456,556
  pour cut-out: 2203.74,919.4 2203.74,860.74 2193,850 2198,845 2267,845 2269,847 2266,850 2266,872
  pour cut-out: 3793,1269 3793,1161.93 3820.01,1134.92 3822,1269 3823,1270
  pour cut-out: 3323,1270 3325.31,1267.69 3325.31,1203.29 3365.13,1163.48 3367.65,1166 3373,1166 3373,1205 3364,1214 3355,1214 3355,1265 3357,1267
  pour cut-out: 3466,1272 3466,1221 3450,1205 3456,1199 3456,1120.48 3460,1116.48 3476.48,1116.48 3496,1136 3496,1273
  pour cut-out: 1649,834 1649,702 1652,699 1653.2,700.2 1681.38,700.2 1681.38,831.62 1677,836
  pour cut-out: 1464,822 1464,694 1468,690 1863,690 1863,826.14 1861,831 1861.86,831 1473,831
  pour cut-out: 1187.13,1680.38 1187.13,1629.13 1181,1623 1131,1623 1131,1674.65 1136.73,1680.38 1134.29,1682.82 1116.33,1682.82 1116.33,1696.12 1112.73,1699.72 1149,1735.99 1149,1738 1514,1738 1521,1731 1521,1714 1515,1714 1496,1695 1236.66,1695
  pour cut-out: 1503,1810 1503,1766 1496,1759 1496,1756 1504.5,1756 1512.69,1764.18 1512.69,1810

## Silkscreen, mask and mechanical layers (free items; w line width, h text height)
Top Overlay:
  text "STM32F334 / BUCK_BOOST" at 3983,1031 h120

## Dimensions
117.11,3020.91 to 4673.41,265 on Top Overlay
-1,315 to 4719,410 on Top Overlay

## Text inside footprints (layer, text, board x,y; h text height)
DECODE: Top Overlay "1" at 3931.97,304.85 h80; Top Overlay "2" at 3925.97,401.85 h80
J1: Top Overlay "1" at 3102.67,764.6 h80; Top Overlay "2" at 3206.69,763.43 h80
OLED1: Top Overlay "4" at 3455,341 h80
SW1: Top Overlay "4" at 2020,463 h80; Top Overlay "1" at 2390,286 h80